# EAGLE board LEDgoes Battery (EAGLE 6.5.0)
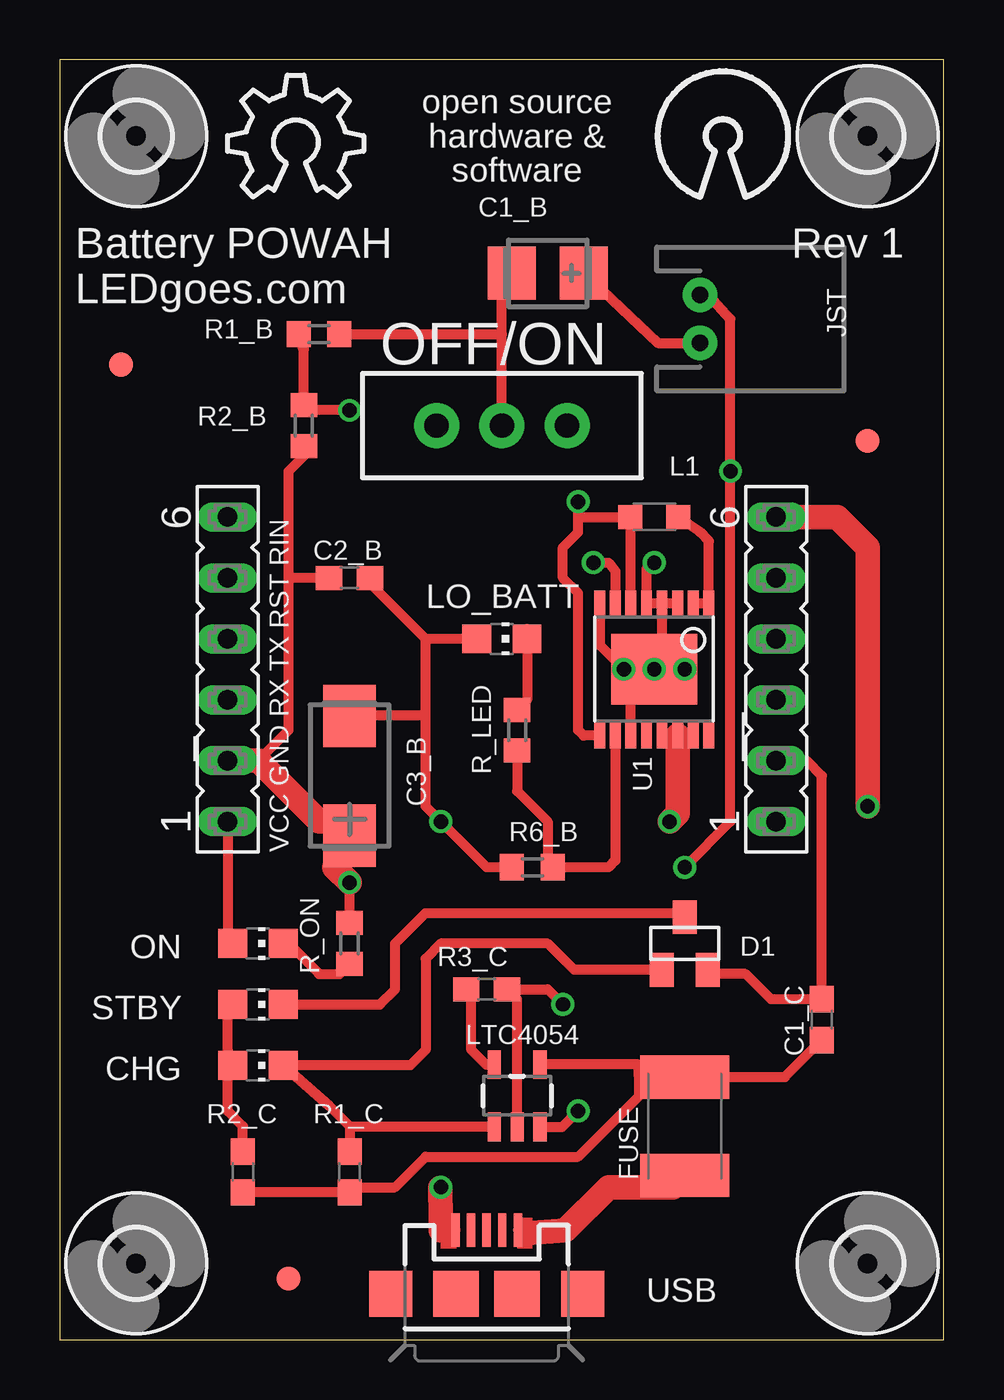
[diagram p0: board, top side]
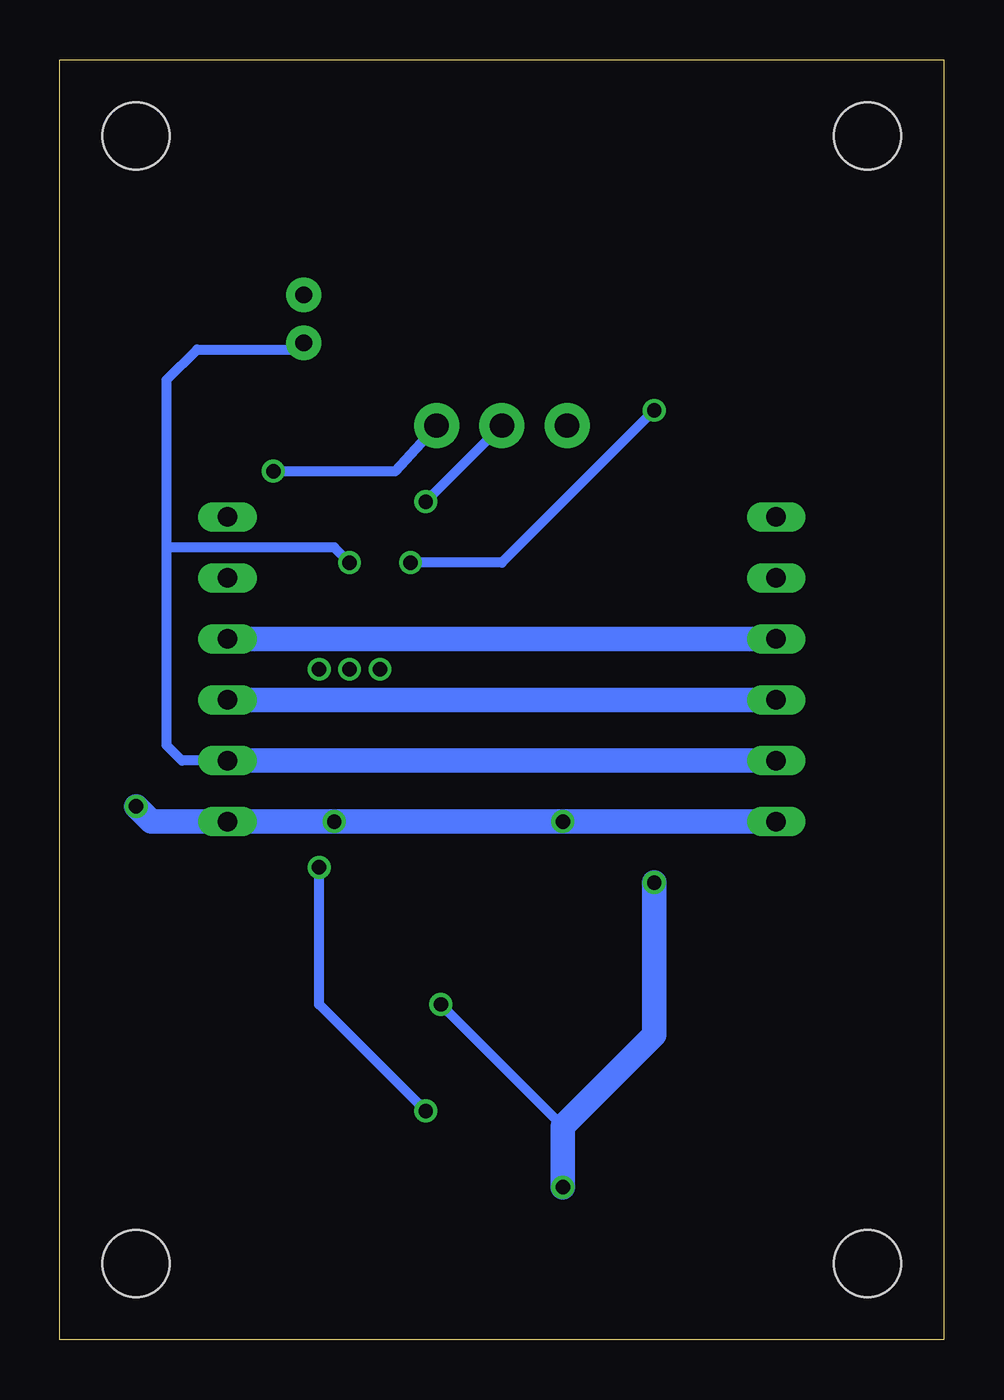
[diagram p1: board, bottom side, seen from below]

Size 36.83 x 53.34 mm. Coordinates in mm from the lower left corner, seen from the top.
Outline: 0,53.34 0,0 36.83,0 36.83,53.34 0,53.34
Copper layers (1*16): Top 0.0356mm / dielectric 1.5011mm / Bottom 0.0356mm
Design rules "LaenPCBOrder *": minimum track width 6mil, minimum drill 13mil, track to track 6mil, track to pad 6mil, pad to pad 6mil, via to via 6mil, smd to smd 6mil, copper to edge 15mil, drill to drill 6mil, minimum pad ring 7mil, minimum via ring 7mil, stop-mask expansion 4mil, vias tented up to drill 0mil, thermal gap 10mil

## Footprints (pad centres in the part's own frame; a part is rotated, then mirrored left to right if it is on the bottom)
FE06 = drill 0.813 long: 1 -6.35,0; 2 -3.81,0; 3 -1.27,0; 4 1.27,0; 5 3.81,0; 6 6.35,0
CT3528 = smd 2 x 2.2: + -1.5,0; - 1.5,0
C0603 = smd 1.1 x 1: 1 -0.85,0; 2 0.85,0
CT6032 = smd 2.6 x 2.2: + -2.5,0; - 2.5,0
CHIP-LED0805 = smd 1.2 x 1.2: A 0,-1.05; C 0,1.05
SOT23 = smd 1 x 1.4: 1 -0.95,-1.1; 2 0.95,-1.1; 3 0,1.1
2,8 = hole 2.8: 0,0
FIDUCIAL_1MM = smd 1 x 1: 1 0,0
C1812K = smd 1.8 x 3.7: 1 -2.05,0; 2 2.05,0
JST-2-PTH-KIT = drill 0.7 pad 1.448: 1 -1,0; 2 1,0
L2012C = smd 1 x 1: 1 -1,0; 2 1,0
SOT23-5 = smd 0.55 x 1.2: 1 -0.95,-1.3; 2 0,-1.3; 3 0.95,-1.3; 4 0.95,1.3; 5 -0.95,1.3
SWITCH-SPDT_KIT = drill 1.016 pad 1.88: 1 0,2.718; 2 0,0; 3 0,-2.718
R0603 = smd 1 x 1.1: 1 -0.85,0; 2 0.85,0
0603 = smd 1.1 x 1: 1 -0.85,0; 2 0.85,0
TSSOP16EXP = smd 0.45 x 1.05: 1 -2.275,-2.768; 2 -1.625,-2.768; 3 -0.975,-2.768; 4 -0.325,-2.768; 5 0.325,-2.768; 6 0.975,-2.768; 7 1.625,-2.768; 8 2.275,-2.768; 9 2.275,2.768; 10 1.625,2.768; 11 0.975,2.768; 12 0.325,2.768; 13 -0.325,2.768; 14 -0.975,2.768; 15 -1.625,2.768; 16 -2.275,2.768 | smd 3.58 x 2.94: EXP 0,0
USB-MICROB = smd 0.35 x 1.4: D+ 0,2.65; D- -0.65,2.65; GND 1.3,2.65; ID 0.65,2.65; VBUS -1.3,2.65 | smd 1.8 x 1.9: MT1 -4,0; MT2 4,0 | smd 1.9 x 1.9: P$1 -1.27,0; P$2 1.27,0

## Placement (x,y rotation side)
_  [FE06]  6.99,27.94 90 top
__  [FE06]  29.84,27.94 90 top
C1_B  10uf  [CT3528]  20.32,44.45 180 top
C1_C  1uf  [C0603]  31.75,13.34 90 top
C2_B  2.2uf  [C0603]  12.06,31.75 0 top
C3_B  220uF  [CT6032]  12.06,23.5 90 top
CHG  [CHIP-LED0805]  8.26,11.43 270 top
D1  2N7002  [SOT23]  26.04,16.51 0 top
E$1  [OSHW_8X200_NOTEXT]  6.99,47.62 0 top
E$2  [2,8]  33.66,50.16 0 top
E$3  [2,8]  3.17,50.16 0 top
E$4  [2,8]  3.17,3.18 0 top
E$5  [2,8]  33.66,3.18 0 top
E$8  [FIDUCIAL_1MM]  2.54,40.64 0 top
E$9  [FIDUCIAL_1MM]  33.66,37.46 0 top
E$10  [FIDUCIAL_1MM]  9.53,2.54 0 top
FUSE  PTC-1812  [C1812K]  26.04,8.89 90 top
JST  [JST-2-PTH-KIT]  26.67,42.54 270 top
L1  6.8uH  [L2012C]  24.76,34.29 180 top
LO_BATT  [CHIP-LED0805]  18.41,29.21 270 top
LTC4054  [SOT23-5]  19.05,10.16 0 top
OFF/ON  [SWITCH-SPDT_KIT]  18.41,38.1 270 top
ON  [CHIP-LED0805]  8.26,16.51 270 top
R1_B  [R0603]  10.79,41.91 180 top
R1_C  10k  [0603]  12.06,6.99 270 top
R2_B  [R0603]  10.16,38.1 270 top
R2_C  1k  [0603]  7.62,6.99 270 top
R3_C  2k  [0603]  17.78,14.61 180 top
R6_B  1M  [R0603]  19.68,19.68 180 top
R_LED  [R0603]  19.05,25.4 270 top
R_ON  [R0603]  12.06,16.51 90 top
STBY  [CHIP-LED0805]  8.26,13.97 270 top
U1  TPS61032  [TSSOP16EXP]  24.76,27.94 180 top
USB  microUSB  [USB-MICROB]  17.78,1.9 0 top

## Library data of the parts
_ __ = con-lsta
C1_B C3_B FUSE = ref-packages
C1_C C2_B E$8-E$10 = adafruit
CHG LO_BATT ON STBY = led
D1 = SparkFun-DiscreteSemi
E$1 = ohw-logo
E$2-E$5 = holes
JST USB = SparkFun-Connectors
L1 = rcl
LTC4054 = XYKlib
OFF/ON = SparkFun-Electromechanical
R1_B R2_B R6_B R_LED R_ON = eagle-ltspice
R1_C R2_C R3_C = SparkFun-Resistors
U1 = linear-technology

## Nets
/CHRG: CHG.C D1.1 LTC4054.1 R1_C.1
EN: C1_B.- L1.2 OFF/ON.2 R1_B.1 U1.6 U1.9
GND: _.2 __.2 C1_B.+ C1_C.2 C2_B.1 C3_B.+ D1.2 JST.2 LTC4054.2 R2_B.2 R3_C.1 R_ON.2 U1.3 U1.4 U1.5 U1.EXP USB.VBUS
LBI: R1_B.2 R2_B.1 U1.7
LBO: R6_B.1 R_LED.2 U1.10
S$1: ON.C R_ON.1
S$7: _.3 __.3
S$8: U1.8 U1.11
S$10: LO_BATT.C R_LED.1
S$11: LTC4054.5 R3_C.2
S$15: CHG.A R2_C.1 STBY.A
S$16: D1.3 STBY.C
S$20: _.4 __.4
S$24: JST.1 LTC4054.3 OFF/ON.1
SW: L1.1 U1.1 U1.2
VCC: FUSE.1 USB.GND
VCC_FUSED: C1_C.1 FUSE.2 LTC4054.4 R1_C.2 R2_C.2
VOUT: _.1 __.1 __.6 C2_B.2 C3_B.- LO_BATT.A ON.A R6_B.2 U1.13 U1.14 U1.15

## Tracks (layer width: path | path; a pad name or v marks a point on that pad's centre or on a via)
/CHRG
  Top 0.406: D1.1 21.42,15.41 20.32,16.51 15.88,16.51 15.24,15.88 15.24,12.07 14.61,11.43 CHG.C 11.21,9.75 12.06,8.89 | 12.06,8.89 R1_C.1 | LTC4054.1 12.1,8.86 12.06,8.89
EN  (via drill 0.6)
  Top 0.406: 21.59,34.29 v21.59,34.92 | 21.59,34.29 L1.2 23.79,34.26 U1.6 | U1.9 21.82,25.17 21.59,25.4 21.59,31.11 20.95,31.75 20.95,33.02 21.59,33.65 21.59,34.29 | OFF/ON.2 18.41,41.91 | 18.41,41.91 18.41,44.04 C1_B.- | R1_B.1 18.41,41.91
  Bottom 0.406: OFF/ON.2 v21.59,34.92
GND  (via drill 0.6)
  Top 0.406: LTC4054.2 19.05,14.19 R3_C.1 20.32,14.61 v20.95,13.97 | __.2 31.11,24.13 31.75,23.5 C1_C.2 29.63,14.19 28.57,15.24 27.15,15.24 D1.2 | C1_B.+ 24.9,41.54 JST.2 | USB.VBUS 15.88,4.55 | 15.85,6.32 v15.88,6.35 | 11.43,19.68 C3_B.+ 11.43,21.59 | 9.53,31.75 9.53,25.4 8.26,24.13 | 9.53,31.75 9.53,36.2 10.16,36.83 R2_B.2 | U1.4 U1.5 24.44,32.06 arc-90 v24.76,32.38 | U1.4 U1.3 | U1.4 25.09,28.27 U1.EXP | R_ON.2 v12.06,19.05 | C2_B.1 9.53,31.75
  Top 1.016: 15.88,4.55 15.88,5.08 15.85,6.32 | v12.06,19.05 11.43,19.68 | 11.43,21.59 10.79,21.59 8.26,24.13 _.2
  Bottom 0.406: __.2 31.75,24.13 32.39,24.77 32.39,33.02 | 32.39,33.02 32.39,40 31.11,41.27 26.94,41.27 JST.2 | v20.95,13.97 15.88,8.89 | v24.76,32.38 25.4,33.02 32.39,33.02
  Bottom 1.016: _.2 __.2 | v15.88,6.35 15.88,8.89 12.06,12.7 v12.06,19.05
LBI  (via drill 0.6)
  Top 0.406: v22.22,32.38 22.86,32.38 23.14,32.03 U1.7 | R1_B.2 10.16,41.27 R2_B.1 10.58,38.73 v12.06,38.73
  Bottom 0.406: v12.06,38.73 18.41,32.38 v22.22,32.38
LBO
  Top 0.406: U1.10 23.14,19.96 22.86,19.68 R6_B.1 20.32,19.9 20.32,21.59 19.05,22.86 R_LED.2
S$1
  Top 0.406: ON.C 9.53,16.51 10.79,15.24 11.64,15.24 R_ON.1
S$2  (via drill 0.6)
  other vias: 23.49,27.94
S$3  (via drill 0.6)
  other vias: 26.04,27.94
S$5  (via drill 0.6)
  other vias: 24.76,27.94
S$7
  Bottom 1.016: _.3 __.3
S$8
  Top 0.406: U1.8 22.49,28.95 23.79,27.64 U1.11
S$10
  Top 0.406: 19.46,29.62 LO_BATT.C 19.46,26.66 R_LED.1
S$11
  Top 0.406: LTC4054.5 17.75,11.46 17.14,12.07 17.14,14.39 R3_C.2
S$15
  Top 0.406: R2_C.1 7.62,8.89 6.99,9.53 6.99,11.21 CHG.A 6.99,12.07 6.99,13.75 STBY.A
S$16
  Top 0.406: STBY.C 13.34,13.97 13.97,14.61 13.97,16.51 15.24,17.78 25.86,17.78 D1.3
S$20
  Bottom 1.016: _.4 __.4
S$24  (via drill 0.6)
  Top 0.406: v26.04,19.68 27.94,21.59 v27.94,36.2 27.94,42.54 27.04,43.54 JST.1 | LTC4054.3 20.92,8.86 v21.59,9.53
  Bottom 0.406: v21.59,9.53 26.04,13.97 v26.04,19.68 | v27.94,36.2 22.86,36.2 OFF/ON.1
SW
  Top 0.406: L1.1 26.67,33.65 27.04,33.28 U1.1 U1.2
VCC
  Top 0.406: USB.GND 19.68,4.45
  Top 1.016: 19.68,4.45 21.06,4.55 22.86,6.35 25.54,6.35 FUSE.1
VCC_FUSED
  Top 0.406: 24.13,10.79 24.13,10.16 21.59,7.62 15.24,7.62 13.97,6.35 12.28,6.35 R1_C.2 R2_C.2 | 24.13,10.79 24.1,11.46 LTC4054.4 | 24.13,10.79 25.89,10.79 FUSE.2 30.2,10.94 C1_C.1
VOUT  (via drill 0.6)
  Top 0.406: C3_B.- 12.06,26.04 15.24,26.04 | 15.24,26.04 15.24,22.23 v15.88,21.59 17.78,19.68 R6_B.2 | 15.24,26.04 15.24,29.21 | U1.13 U1.14 U1.15 | _.1 6.99,16.73 ON.A | LO_BATT.A 15.24,29.21 | C2_B.2 12.92,31.54 15.24,29.21
  Top 1.016: v33.66,22.23 33.66,33.02 32.39,34.29 __.6 | U1.14 25.74,21.93 v25.4,21.59
  Bottom 1.016: v33.66,22.23 33.02,21.59 __.1 v25.4,21.59 v15.88,21.59 _.1
(copper drawn outside any net)
  shapes: Top area x2

## Text on the board
tNames: open source / hardware & / software | Battery POWAH | Rev 1 | LEDgoes.com | VCC GND RX TX RST RIN